# Altium PCB L2_Output.PcbDoc
Units mm, origin at the board's own origin, x right, y up, seen from the top; angles counter-clockwise.
Board outline 96.01 x 58.01 mm, 2 copper layers (Top Layer, Bottom Layer); 71 components, 66 nets, 304 pads, 134 vias.
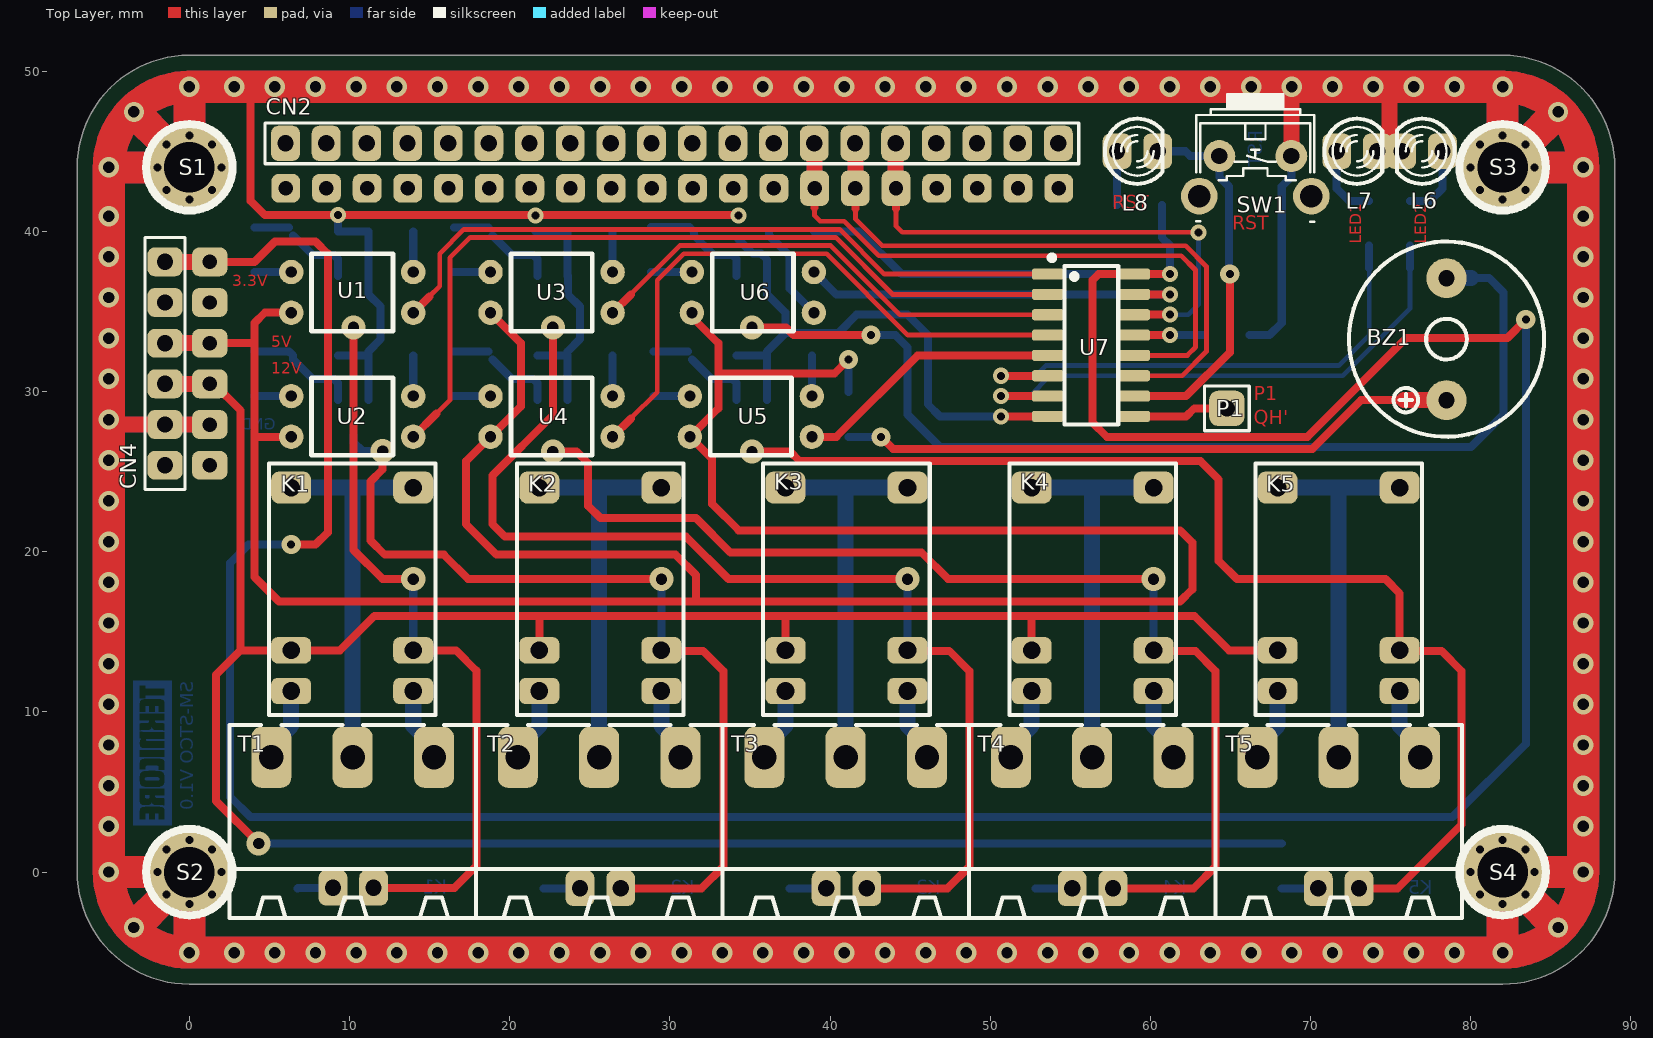
[diagram p0: Top Layer view]
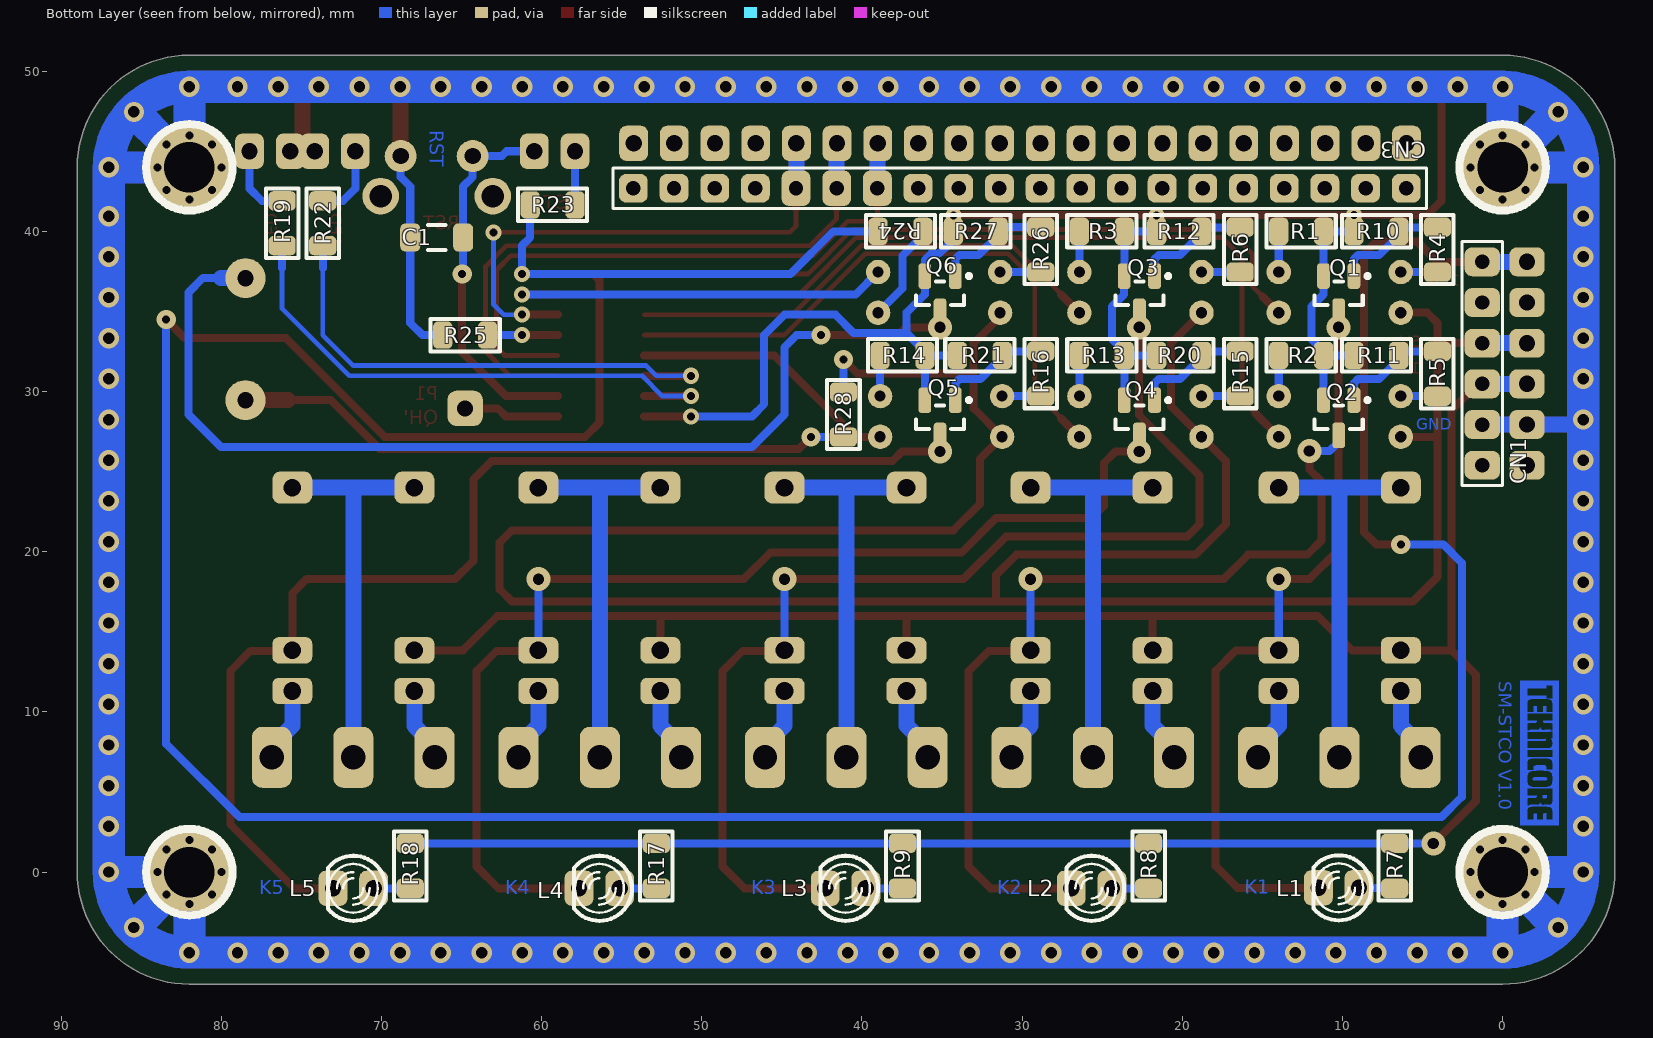
[diagram p1: Bottom Layer view, seen from below]

## Layer stack, top to bottom
Top Solder: solder mask 0.0102, Solder Resist, Dk 3.5
Top Layer: signal copper 0.0356
Dielectric 1: dielectric 0.32, FR-4, Dk 4.8
Bottom Layer: signal copper 0.0356
Bottom Solder: solder mask 0.0102, Solder Resist, Dk 3.5

## Board outline
-7.013,0 ccw(c-0.009,0) -0.009,-7.004 81.991,-7.004 ccw(c81.991,0) 88.995,0 88.995,44 ccw(c81.991,44) 81.991,51.003 -0.009,51.003 ccw(c-0.009,44) -7.013,44

## Design rules (kind name [scope] priority, off if disabled: settings)
Clearance [All] p1: gap=0.2 ignorepadtopadclearanceinfootprint=FALSE
PolygonConnect [All] p1: connectstyle=Relief reliefconductorwidth=0.254 reliefentries=4 polygonreliefangle="90 Angle" airgapwidth=0.254
RoutingVias [All] p1: holewidth=0.711 width=1.27 viastyle="Through Hole" minholewidth=0.5 minwidth=1 maxholewidth=0.711 maxwidth=1.27
SolderMaskExpansion [All] p1: expansion=0.102 istentingtop=FALSE
Width [All] p1: maxlimit=3 minlimit=0.2 preferedwidth=0.5
30 further rules are at their usual default settings.

## Components (designator, comment, footprint, x,y, rotation, side; value= is the part's Value field where it differs from the comment)
BZ1 "Buzzer" Buzzer 78.486,33.274 r90 top
C1 "100nF" CAP1206 66.548,39.624 r180 bottom
CN1 "Header Male 1x6" "HDR_M_1x6PIN_0.2\"" 1.261,38.1 r270 bottom
CN2 "Header Female 1x20" "HDR_F_1x20PIN_0.2\"" 30.121,45.5 r0 top
CN3 "Header Male 1x20" "HDR_M_1x20PIN_0.2\"" 30.141,42.697 r0 bottom
CN4 "Header Female 1x6" "HDR_F_1x6PIN_0.2\"" -1.533,31.75 r270 top
K1 "HJR4102" RELAY_HJR-4102-L-05V 10.16,17.653 r270 top
K2 "HJR4102" RELAY_HJR-4102-L-05V 25.654,17.653 r270 top
K3 "HJR4102" RELAY_HJR-4102-L-05V 41.021,17.653 r270 top
K4 "HJR4102" RELAY_HJR-4102-L-05V 56.388,17.653 r270 top
K5 "HJR4102" RELAY_HJR-4102-L-05V 71.755,17.653 r270 top
L1 "Color?" LED_3mm_R 10.225,-0.986 r0 bottom
L2 "Color?" LED_3mm_R 25.654,-1.016 r0 bottom
L3 "Color?" LED_3mm_R 41.021,-1.016 r0 bottom
L4 "Color?" LED_3mm_R 56.388,-1.016 r0 bottom
L5 "Color?" LED_3mm_R 71.755,-1.016 r0 bottom
L6 "Color?" LED_3mm_R 76.962,45.006 r180 top
L7 "Color?" LED_3mm_R 72.898,45.006 r0 top
L8 "Red" LED_3mm_R 59.182,45.006 r0 top
P1 "Header 1x1" "HDR 1X1-2.54mm" 64.77,28.956 r0 top
Q1 "C945" SOT23_M 10.226,36.111 r270 bottom
Q2 "C945" SOT23_M 10.226,28.364 r270 bottom
Q3 "C945" SOT23_M 22.672,36.111 r270 bottom
Q4 "C945" SOT23_M 22.672,28.364 r270 bottom
Q5 "C945" SOT23_M 35.118,28.364 r270 bottom
Q6 "C945" SOT23_M 35.118,36.111 r270 bottom
R1 "220R" Resistor_SMD_1206 12.57,40.005 r180 bottom
R2 "220R" Resistor_SMD_1206 12.57,32.258 r180 bottom
R3 "220R" Resistor_SMD_1206 25.016,40.005 r180 bottom
R4 "1.5K" Resistor_SMD_1206 4.064,38.865 r270 bottom
R5 "1.5K" Resistor_SMD_1206 4.064,31.112 r270 bottom
R6 "1.5K" Resistor_SMD_1206 16.383,38.865 r270 bottom
R7 "1K" Resistor_SMD_1206 6.731,0.384 r270 bottom
R8 "1K" Resistor_SMD_1206 22.098,0.384 r270 bottom
R9 "1K" Resistor_SMD_1206 37.465,0.384 r270 bottom
R10 "10K" Resistor_SMD_1206 7.874,40.005 r180 bottom
R11 "10K" Resistor_SMD_1206 7.874,32.258 r180 bottom
R12 "10K" Resistor_SMD_1206 20.19,40.005 r180 bottom
R13 "220R" Resistor_SMD_1206 25.019,32.258 r180 bottom
R14 "220R" Resistor_SMD_1206 37.462,32.258 r180 bottom
R15 "1.5K" Resistor_SMD_1206 16.383,31.118 r270 bottom
R16 "1.5K" Resistor_SMD_1206 28.829,31.118 r270 bottom
R17 "1K" Resistor_SMD_1206 52.832,0.384 r270 bottom
R18 "1K" Resistor_SMD_1206 68.199,0.384 r270 bottom
R19 "1K" Resistor_SMD_1206 76.2,40.51 r90 bottom
R20 "10K" Resistor_SMD_1206 20.19,32.258 r180 bottom
R21 "10K" Resistor_SMD_1206 32.633,32.258 r180 bottom
R22 "1K" Resistor_SMD_1206 73.66,40.51 r90 bottom
R23 "82R" Resistor_SMD_1206 59.312,41.656 r0 bottom
R24 "2.4K" Resistor_SMD_1206 37.589,40.005 r0 bottom
R25 "10K" Resistor_SMD_1206 64.77,33.528 r0 bottom
R26 "5.6K" Resistor_SMD_1206 28.829,38.865 r270 bottom
R27 "10K" Resistor_SMD_1206 32.89,40.005 r180 bottom
R28 "15R" Resistor_SMD_1206 41.148,28.572 r90 bottom
S1 "Screw" "Screw 3mm-Invirons 0.254mm" -0.009,44 r0 top
S2 "Screw" "Screw 3mm-Invirons 0.254mm" -0.009,0 r0 top
S3 "Screw" "Screw 3mm-Invirons 0.254mm" 81.991,44 r0 top
S4 "Screw" "Screw 3mm-Invirons 0.254mm" 81.991,0 r0 top
SW1 "Push Button" SW_PushBotton_Right 66.548,44.704 r180 top
T1 "Phoenix" "MSTB 2,5/3-G-5,08" 10.185,7.163 r0 top
T2 "Phoenix" "MSTB 2,5/3-G-5,08" 25.578,7.163 r0 top
T3 "Phoenix" "MSTB 2,5/3-G-5,08" 40.97,7.163 r0 top
T4 "Phoenix" "MSTB 2,5/3-G-5,08" 56.363,7.163 r0 top
T5 "Phoenix" "MSTB 2,5/3-G-5,08" 71.755,7.163 r0 top
U1 "PC817" "PC817 DIP" 10.16,36.195 r180 top
U2 "PC817" "PC817 DIP" 10.16,28.448 r180 top
U3 "PC817" "PC817 DIP" 22.606,36.195 r180 top
U4 "PC817" "PC817 DIP" 22.606,28.448 r180 top
U5 "PC817" "PC817 DIP" 35.052,28.448 r180 top
U6 "PC817" "PC817 DIP" 35.179,36.195 r180 top
U7 "SN74HC595" SOIC16 56.289,32.893 r270 top

## Footprints (in the part's own frame and the unit in brackets; to place one, negate y for a bottom-side part, rotate by r counter-clockwise, add the part's x,y. Pads: shape width x height; smd on the part's side, far side on the other; paste and mask are expansions set on the pad)
Buzzer [mm]
  round 2.5 hole 1.016: 1(-3.81,0) 2(3.81,0)
  silkscreen extent -6.1,-6.1 6.1,6.09, body extent -5.9,-5.9 5.9,5.9, height 10
CAP1206 [mm] "Chip Capacitor, 2-Leads, Body 3/20x1/60mm, IPC Medium Density DESIGNER:ABBAS BASEREH"
  rrect50% 1.25x1.75 smd: 1(-1.651,0) 2(1.651,0)
  silkscreen extent -0.55,-0.77 0.55,0.77, body extent -1.65,-0.85 1.65,0.85, height 0.94
"HDR 1X1-2.54mm" [mm] "1x1x2.54 Pin Header TH V"
  rrect50% 2.2x2.2 hole 1: 1(0,0)
  silkscreen extent -1.4,-1.4 1.4,1.4, body extent -1.27,-1.27 1.27,1.27, height 8.55
"HDR_F_1x6PIN_0.2\"" [mm] "6 row, straight, gold plating"
  rrect50% 1.8x2.2 hole 1.02: 1(-6.35,0) 2(-3.81,0) 3(-1.27,0) 4(1.27,0) 5(3.81,0) 6(6.35,0)
  silkscreen extent -7.87,-1.25 7.87,1.25, body extent -7.87,-1.25 7.87,1.25, height 8.55
"HDR_F_1x20PIN_0.2\"" [mm] "20 row, straight, gold plating"
  rrect50% 1.8x2.2 hole 1.02: 1(-24.13,0) 2(-21.59,0) 3(-19.05,0) 4(-16.51,0) 5(-13.97,0) 6(-11.43,0) 7(-8.89,0) 8(-6.35,0) 9(-3.81,0) 10(-1.27,0) 11(1.27,0) 12(3.81,0) 13(6.35,0) 14(8.89,0) 15(11.43,0) 16(13.97,0) 17(16.51,0) 18(19.05,0) 19(21.59,0) 20(24.13,0)
  silkscreen extent -25.4,-1.27 25.4,1.27, body extent -25.65,-1.25 25.65,1.25, height 8.55
"HDR_M_1x6PIN_0.2\"" [mm] "6 row, straight, gold plating"
  rrect50% 1.8x2.2 hole 0.9: 1(0,0) 2(2.54,0) 3(5.08,0) 4(7.62,0) 5(10.16,0) 6(12.7,0)
  silkscreen extent -1.27,-1.27 13.97,1.27, body extent -1.28,-1.38 13.96,1.54, height 8.61
"HDR_M_1x20PIN_0.2\"" [mm] "2.00 mm THT Pin Header, 20p"
  rrect50% 1.8x1.8 hole 0.9: 1(-24.13,0) 2(-21.59,0) 3(-19.05,0) 4(-16.51,0) 5(-13.97,0) 6(-11.43,0) 7(-8.89,0) 8(-6.35,0) 9(-3.81,0) 10(-1.27,0) 11(1.27,0) 12(3.81,0) 13(6.35,0) 17(16.51,0) 18(19.05,0) 19(21.59,0) 20(24.13,0)
  rrect50% 1.8x2.2 hole 0.9: 14(8.89,0) 15(11.43,0) 16(13.97,0)
  silkscreen extent -25.4,-1.27 25.4,1.27, body extent -25.39,-1.27 25.4,1.26, height 8.51
LED_3mm_R [mm]
  rrect50% 1.8x2.2 hole 1.016: A(-1.27,0) K(1.27,0)
  silkscreen extent -2.03,-2.03 1.57,2.03, body extent -1.66,-1.65 1.64,1.65, height 5.51
"MSTB 2,5/3-G-5,08" [mm] "Header, Nominal current: 12 A Rated voltage (III/2): 320 V Number of positions: 3 Pitch: 5.08 mm Color: green Contact surface: Tin Assembly: Soldering  DESIGNER:ABBAS BASEREH"
  rrect50% 2.5x3.8 hole 1.524: 1(-5.08,0) 2(0,0) 3(5.08,0)
  silkscreen extent -7.7,-10.03 7.7,2.03, body extent -7.62,-10 7.62,2, height 8.63
"PC817 DIP" [mil]
  round 60 hole 27.56: 1(-150,50) 2(-150,-50) 3(150,-50) 4(150,50)
  round 19.68 on Top Overlay: ""(-120,95) ""(-80,75)
  silkscreen extent -100,-95 100,96, body extent -155,-91 154,90, height 154
RELAY_HJR-4102-L-05V [mm]
  rrect50% 2x2.5 hole 1.1: 1(-6.35,-3.81) 12(-6.35,3.81)
  rrect50% 1.65x2.5 hole 1.1: 5(3.81,-3.81) 6(6.35,-3.81) 7(6.35,3.81) 8(3.81,3.81)
  silkscreen extent -7.85,-5.2 7.85,5.2, body extent -7.85,-5.2 7.85,5.2, height 11.7
Resistor_SMD_1206 [mm]
  rrect50% 1.2x1.7 smd: 1(-1.4,0) 2(1.4,0)
  silkscreen extent -2.16,-1.02 2.16,1.02, body extent -1.52,-0.76 1.52,0.76, height 0.6
"Screw 3mm-Invirons 0.254mm" [mm]
  round 0.5 hole 0.5: S(-2,0) S(-1.414,-1.414) S(-1.414,1.414) S(0,-2) S(0,2) S(1.414,-1.414) S(1.414,1.414) S(2,0)
  round 5 hole 3.15 mask+0.1: S(0,0)
  silkscreen extent -2.7,-2.7 2.7,2.7, body extent -2.8,-2.8 2.8,2.8, height 2.58
SOIC16 [mm] "(Make www.tarahiboard.com)"
  rrect50% 0.7x2 smd: 1(-4.445,-2.695) 2(-3.175,-2.695) 3(-1.905,-2.695) 4(-0.635,-2.695) 5(0.635,-2.695) 6(1.905,-2.695) 7(3.175,-2.695) 8(4.445,-2.695) 9(4.445,2.695) 10(3.175,2.695) 11(1.905,2.695) 12(0.635,2.695) 13(-0.635,2.695) 14(-1.905,2.695) 15(-3.175,2.695) 16(-4.445,2.695)
  silkscreen extent -5.54,-2.52 4.95,1.7, body extent -5.09,-3.03 5.11,2.97, height 1.7
SOT23_M [mm] "SOT23, 3-Leads, Body 2.9x1.3mm, Pitch 0.95mm, Lead Span 2.3mm, IPC Low Density"
  rrect50% 1.6x0.8 smd: 1(-1.1,0.95) 2(-1.1,-0.95) 3(1.1,0)
  silkscreen extent -1.22,-1.5 0.7,1.92, body extent -1.27,-1.5 1.27,1.5, height 1.1
SW_PushBotton_Right [mm] "Horizontal 6.0mm Square Type (Snap-in) SKHH Series; Stem length 3.85 mm ; 1,000,000 cycles ; 0.98N Force"
  round 2 hole 1.016: 1(-2.25,0) 2(2.25,0)
  round 2.286 hole 1.397: MH(-3.5,2.5) MH(3.5,2.5)
  silkscreen extent -3.68,-3.85 3.68,4.09, body extent -4.25,-3.86 4.25,4.04, height 7.43

## Part data
C1: library part "Capacitor Poliester & Ceramic", "Capacitor Poliester & Ceramic"
K1 K2 K3 K4 K5: library part Relay_HJR4102, "Small size and low cost", ComponentLink1Description=Datasheet
L1 L2 L3 L4 L5 L6 L7 L8: library part LED, "LED"
P1: library part "Header Male 1x1"
Q1 Q2 Q3 Q4 Q5 Q6: "NPN Silicon Epitaxial Planar Transistor"
R1 R2 R3 R4 R5 R6 R7 R8 R9 R10 R11 R12 R13 R14 R15 R16 R17 R18 R19 R20 R21 R22 R23 R24 R25 R26 R27 R28: library part Resistor, "Resistor"
SW1: library part "Push Button 4PIN Right", "Push Button 4PIN Right"
T1 T2 T3 T4 T5: library part "Terminal Phoenix 3 Pin", "Terminal Phoenix 3 Pin"
U1 U2 U3 U4 U5 U6: "1-CHANNEL TRANSISTOR OUTPUT TYPE PHOTO COUPLER"
U7: "SNx4HC595 8-Bit Shift Registers With 3-State Output Registers"

## Free pads (board coordinates)
  round 1.5 on Mech1: 28(-0.009,44) 28(-0.009,44) 29(-0.009,0) 29(-0.009,0) 30(81.991,0) 30(81.991,0) 31(81.991,44) 31(81.991,44) 32(-1.533,38.1) 32(-1.533,38.1) 32(-1.533,38.1) 32(1.261,38.1) 32(1.261,38.1) 32(1.261,38.1) 32(6.011,42.697) 32(6.011,42.697) 32(6.011,42.697) 33(5.991,45.5) 33(5.991,45.5) 33(5.991,45.5)

## Via types
v1: diameter 1.27, hole 0.711, Top Layer to Bottom Layer, 106 vias
v2: diameter 1, hole 0.5, Top Layer to Bottom Layer, 11 vias
v3: diameter 1.5, hole 0.7, Top Layer to Bottom Layer, 11 vias
v4: diameter 1.2, hole 0.5, Top Layer to Bottom Layer, 6 vias

## Nets (pads, with @x,y where several pads share a name; then routed paths per layer and width w, separated by ;. In a path a pad name is that pad's centre, name@x,y a point inside that pad or via, vN(x,y) a via of type N, cw(c..) or ccw(c..) an arc to the next point about the centre after c; other vN are vias at no path point)
+3.3: CN1.1 CN4.1 R23.2 R24.2 U7.16 | length 234.7
  Top Layer w0.5: CN1.1 4.064,38.1 5.334,39.37 7.874,39.37 8.636,38.608 8.636,21.209 7.874,20.447 v4(6.35,20.447) ; v2(61.214,37.338) 56.769,37.338 56.388,36.957 56.388,28.067 57.277,27.178 69.799,27.178 75.971,33.35 82.296,33.35 v4(83.439,34.493)
  Top Layer w1: CN4.1 CN1.1
  Bottom Layer w0.5: v4(6.35,20.447) 3.683,20.447 2.54,19.304 2.54,4.699 3.81,3.429 78.867,3.429 83.439,8.001 v4(83.439,34.493) ; R24.2 41.783,40.005 44.45,37.338 v2(61.214,37.338) 61.214,39.116 60.712,39.618 R23.2
  Bottom Layer w1: CN4.1 CN1.1
+5: CN1.3 CN4.3 R28.2 U1.4 U2.4 U3.4 U4.4 U5.4 U6.4 | length 179.8
  Top Layer w0.5: CN1.3 4.064,33.02 ; U2.4 4.064,27.178 ; U1.4 4.699,34.925 4.064,34.29 4.064,33.02 ; U3.4 20.701,33.02 20.701,29.083 U4.4 17.272,25.654 17.272,21.717 19.177,19.812 30.353,19.812 31.623,18.542 31.623,16.891 ; U6.4@31.115,34.925 33.02,33.02 33.02,31.115 ; v4(41.148,32.004) 40.259,31.115 33.02,31.115 ; 4.064,27.178 4.064,18.415 5.588,16.891 31.623,16.891 ; 4.064,27.178 4.064,33.02 ; 31.623,16.891 61.849,16.891 62.611,17.653 62.611,20.574 61.849,21.336 34.29,21.336 32.639,22.987 32.639,25.781 U5.4 33.02,28.956 33.02,31.115
  Top Layer w1: CN4.3 CN1.3
  Bottom Layer w0.5: R28.2 v4(41.148,32.004)
  Bottom Layer w1: CN4.3 CN1.3
+12: CN1.4 CN4.4 K1.5 K2.5 K3.5 K4.5 K5.5 R7.1 R8.1 R9.1 R17.1 R18.1 | length 180.4
  Top Layer w0.5: CN1.4 1.524,30.48 3.175,28.829 3.175,13.843 ; v3(4.318,1.778) 1.651,4.445 1.651,12.319 3.175,13.843 ; K5.5 64.897,13.843 62.738,16.002 52.578,16.002 ; 3.175,13.843 K1.5 9.398,13.843 11.557,16.002 21.844,16.002 ; 21.844,16.002 37.211,16.002 ; 21.844,16.002 K2.5 21.844,16.002 ; 37.211,16.002 K3.5 37.211,16.002 ; 37.211,16.002 52.578,16.002 ; 52.578,16.002 K4.5 52.578,16.002
  Top Layer w1: CN4.4 CN1.4
  Bottom Layer w0.5: v3(4.318,1.778) 4.324,1.784 R7.1 R8.1 R9.1 R17.1 R18.1
  Bottom Layer w1: CN4.4 CN1.4
Buzzer: U6.2 U7.15 | length 25
  Top Layer w0.5: U7.15 v2(61.214,36.068)
  Bottom Layer w0.5: U6.2 40.386,36.068 v2(61.214,36.068)
GND: C1.1 CN1.5 CN4.5 L6.K L7.K Q1.2 Q2.2 Q3.2 Q4.2 Q5.2 Q6.2 R1.2 R2.2 R3.2 R10.1 R11.1 R12.1 R13.2 R14.2 R20.1 R21.1 R25.2 R27.1 S1.S S2.S S3.S S4.S SW1.1 U7.8 | length 881.7
  Top Layer w0.5: 3.81,49.022 3.81,41.91 4.699,41.021 34.25,41.021 v2(34.29,40.981) ; v2(21.59,40.981) v2@21.61,41.001 ; v2(50.673,28.448) U7.8
  Top Layer w1: v1@-5.042,27.9 -5.002,27.94 CN4.5 CN1.5 ; 62.753,49.033 62.753,49.5 ; SW1.1 v1@68.798,49.033 ; L7.K@74.93,44.74 74.93,49.033
  Top Layer w2: v1(-3.47,-3.461) -1.423,-1.414 S2.S@-0.009,0 ; v1(-3.47,47.461) -1.423,45.414 S1.S@-0.009,44 ; v1(85.452,-3.461) 83.405,-1.414 S4.S@81.991,0 ; v1(85.452,47.461) 83.405,45.414 S3.S@81.991,44 ; v1(-5.042,0) ccw(c-0.009,0) v1(-0.009,-5.033) ; v1(-5.042,0) v1(-5.042,2.852) v1(-5.042,5.392) v1(-5.042,7.932) v1(-5.042,10.472) v1(-5.042,13.012) v1(-5.042,15.552) v1(-5.042,18.092) v1(-5.042,20.632) v1(-5.042,23.172) v1(-5.042,25.712) -5.042,27.9 v1(-5.042,28.252) v1(-5.042,30.792) v1(-5.042,33.332) v1(-5.042,35.872) v1(-5.042,38.412) v1(-5.042,40.952) v1(-5.042,44) ; v1(-5.042,0) -2.009,0 S2.S@-0.009,0 ; v1(-5.042,44) cw(c-0.009,44) v1(-0.009,49.033) ; v1(-5.042,44) cw(c-0.009,44) v1(-0.009,49.033) ; v1(-5.042,44) cw(c-0.009,44) v1(-0.009,49.033) ; v1(-5.042,44) -2.009,44 S1.S@-0.009,44 ; v1(-0.009,-5.033) v1(2.785,-5.033) v1(5.325,-5.033) v1(7.865,-5.033) v1(10.405,-5.033) v1(12.945,-5.033) v1(15.485,-5.033) v1(18.025,-5.033) v1(20.565,-5.033) v1(23.105,-5.033) v1(25.645,-5.033) v1(28.185,-5.033) v1(30.725,-5.033) v1(33.265,-5.033) v1(35.805,-5.033) v1(38.345,-5.033) v1(40.885,-5.033) v1(43.425,-5.033) v1(45.965,-5.033) v1(48.505,-5.033) v1(51.045,-5.033) v1(53.585,-5.033) v1(56.125,-5.033) v1(58.665,-5.033) v1(61.205,-5.033) v1(63.745,-5.033) v1(66.285,-5.033) v1(68.825,-5.033) v1(71.365,-5.033) v1(73.905,-5.033) v1(76.445,-5.033) v1(78.985,-5.033) v1(81.991,-5.033) ; v1(-0.009,-5.033) -0.009,-2 S2.S@-0.009,0 ; S1.S@-0.009,44 -0.009,46 v1(-0.009,49.033) ; v1(-0.009,49.033) v1(2.785,49.033) v1(5.325,49.033) v1(7.865,49.033) v1(10.405,49.033) v1(12.945,49.033) v1(15.485,49.033) v1(18.025,49.033) v1(20.565,49.033) v1(23.105,49.033) v1(25.645,49.033) v1(28.185,49.033) v1(30.725,49.033) v1(33.265,49.033) v1(35.805,49.033) v1(38.345,49.033) v1(40.885,49.033) v1(43.425,49.033) v1(45.965,49.033) v1(48.505,49.033) v1(51.045,49.033) v1(53.585,49.033) v1(56.125,49.033) v1(58.665,49.033) v1(61.205,49.033) 62.753,49.033 v1(63.745,49.033) v1(66.285,49.033) 68.798,49.033 v1(68.825,49.033) v1(71.365,49.033) v1(73.905,49.033) 74.93,49.033 v1(76.445,49.033) v1(78.985,49.033) v1(81.991,49.033) ; v1(81.991,-5.033) ccw(c81.991,0) v1(87.024,0) ; v1(81.991,-5.033) ccw(c81.991,0) v1(87.024,0) ; v1(81.991,-5.033) 81.991,-2 S4.S@81.991,0 ; S4.S@81.991,0 83.991,0 v1(87.024,0) ; S3.S@81.991,44 83.991,44 v1(87.024,44) ; S3.S@81.991,44 81.991,46 v1(81.991,49.033) ; v1(81.991,49.033) cw(c81.991,44) v1(87.024,44) ; v1(81.991,49.033) cw(c81.991,44) v1(87.024,44) ; v1(87.024,0) v1(87.024,2.852) v1(87.024,5.392) v1(87.024,7.932) v1(87.024,10.472) v1(87.024,13.012) v1(87.024,15.552) v1(87.024,18.092) v1(87.024,20.632) v1(87.024,23.172) v1(87.024,25.712) v1(87.024,28.252) v1(87.024,30.792) v1(87.024,33.332) v1(87.024,35.872) v1(87.024,38.412) v1(87.024,40.952) v1(87.024,44)
  Bottom Layer w0.5: v2(9.271,41.013) 9.271,40.008 R10.1 R10.1@9.306,40.037 ; R11.1 R2.2 ; R10.1@9.306,40.005 R1.2 Q1.2@11.17,37.217 ; Q2.2 11.17,29.47 R2.2 ; Q1.2 11.176,36.068 11.938,35.306 11.938,33.274 11.17,32.506 R2.2 ; R12.1 R3.2 Q3.2@23.616,37.217 ; R20.1@21.72,32.258 23.616,32.258 Q4.2@23.616,29.47 ; R13.2@23.616,32.506 24.384,33.274 24.384,35.306 23.622,36.068 Q3.2 ; R21.1@34.166,32.258 R14.2 ; R27.1@34.29,39.497 34.629,39.158 35.179,38.608 35.687,38.608 36.068,38.227 Q6.2 36.068,36.068 37.211,34.925 37.211,33.655 ; Q5.2@36.062,29.47 R14.2 ; v2(50.673,28.448) 46.863,28.448 46.101,29.21 46.101,33.528 44.831,34.798 41.656,34.798 40.513,33.655 37.211,33.655 ; R25.2 67.437,33.528 68.199,34.29 C1.1 68.199,42.799 68.798,43.398 SW1.1 ; R14.2 36.062,32.506 37.211,33.655
  Bottom Layer w1: v1@-5.002,27.94 CN4.5 CN1.5
  Bottom Layer w2: v1(-3.47,-3.461) -1.423,-1.414 S2.S@-0.009,0 ; v1(-3.47,47.461) -1.423,45.414 S1.S@-0.009,44 ; v1(85.452,-3.461) 83.405,-1.414 S4.S@81.991,0 ; v1(85.452,47.461) 83.405,45.414 S3.S@81.991,44 ; v1(-5.042,0) ccw(c-0.009,0) v1(-0.009,-5.033) ; v1(-5.042,0) v1(-5.042,2.852) v1(-5.042,5.392) v1(-5.042,7.932) v1(-5.042,10.472) v1(-5.042,13.012) v1(-5.042,15.552) v1(-5.042,18.092) v1(-5.042,20.632) v1(-5.042,23.172) v1(-5.042,25.712) v1(-5.042,28.252) v1(-5.042,30.792) v1(-5.042,33.332) v1(-5.042,35.872) v1(-5.042,38.412) v1(-5.042,40.952) v1(-5.042,44) ; v1(-5.042,0) -2.009,0 S2.S@-0.009,0 ; v1(-5.042,44) cw(c-0.009,44) v1(-0.009,49.033) ; v1(-5.042,44) cw(c-0.009,44) v1(-0.009,49.033) ; v1(-5.042,44) -2.009,44 S1.S@-0.009,44 ; v1(-0.009,-5.033) v1(2.785,-5.033) v1(5.325,-5.033) v1(7.865,-5.033) v1(10.405,-5.033) v1(12.945,-5.033) v1(15.485,-5.033) v1(18.025,-5.033) v1(20.565,-5.033) v1(23.105,-5.033) v1(25.645,-5.033) v1(28.185,-5.033) v1(30.725,-5.033) v1(33.265,-5.033) v1(35.805,-5.033) v1(38.345,-5.033) v1(40.885,-5.033) v1(43.425,-5.033) v1(45.965,-5.033) v1(48.505,-5.033) v1(51.045,-5.033) v1(53.585,-5.033) v1(56.125,-5.033) v1(58.665,-5.033) v1(61.205,-5.033) v1(63.745,-5.033) v1(66.285,-5.033) v1(68.825,-5.033) v1(71.365,-5.033) v1(73.905,-5.033) v1(76.445,-5.033) v1(78.985,-5.033) v1(81.991,-5.033) ; v1(-0.009,-5.033) -0.009,-2 S2.S@-0.009,0 ; S1.S@-0.009,44 -0.009,46 v1(-0.009,49.033) ; v1(-0.009,49.033) v1(2.785,49.033) v1(5.325,49.033) v1(7.865,49.033) v1(10.405,49.033) v1(12.945,49.033) v1(15.485,49.033) v1(18.025,49.033) v1(20.565,49.033) v1(23.105,49.033) v1(25.645,49.033) v1(28.185,49.033) v1(30.725,49.033) v1(33.265,49.033) v1(35.805,49.033) v1(38.345,49.033) v1(40.885,49.033) v1(43.425,49.033) v1(45.965,49.033) v1(48.505,49.033) v1(51.045,49.033) v1(53.585,49.033) v1(56.125,49.033) v1(58.665,49.033) v1(61.205,49.033) v1(63.745,49.033) v1(66.285,49.033) v1(68.825,49.033) v1(71.365,49.033) v1(73.905,49.033) v1(76.445,49.033) v1(78.985,49.033) v1(81.991,49.033) ; v1(81.991,-5.033) ccw(c81.991,0) v1(87.024,0) ; v1(81.991,-5.033) ccw(c81.991,0) v1(87.024,0) ; v1(81.991,-5.033) 81.991,-2 S4.S@81.991,0 ; S4.S@81.991,0 83.991,0 v1(87.024,0) ; S3.S@81.991,44 81.991,46 v1(81.991,49.033) ; S3.S@81.991,44 83.991,44 v1(87.024,44) ; v1(81.991,49.033) cw(c81.991,44) v1(87.024,44) ; v1(81.991,49.033) cw(c81.991,44) v1(87.024,44) ; v1(87.024,0) v1(87.024,2.852) v1(87.024,5.392) v1(87.024,7.932) v1(87.024,10.472) v1(87.024,13.012) v1(87.024,15.552) v1(87.024,18.092) v1(87.024,20.632) v1(87.024,23.172) v1(87.024,25.712) v1(87.024,28.252) v1(87.024,30.792) v1(87.024,33.332) v1(87.024,35.872) v1(87.024,38.412) v1(87.024,40.952) v1(87.024,44)
LED_1: R22.1 U7.6 | length 32.5
  Top Layer w0.5: v2(50.673,30.988) U7.6
  Bottom Layer w0.3: v2(50.673,30.988) 52.832,30.988 53.467,31.623 71.755,31.623 73.66,33.528 73.66,37.719
  Bottom Layer w0.5: 73.66,37.719 R22.1
LED_2: R19.1 U7.7 | length 36
  Top Layer w0.5: v2(50.673,29.718) U7.7
  Bottom Layer w0.3: v2(50.673,29.718) 52.451,29.718 53.721,30.988 72.009,30.988 76.2,35.179 R19.1
  Bottom Layer w0.5: 76.2,37.719 R19.1
NetBZ1_1: BZ1.1 R28.1 | length 38.9
  Top Layer w0.5: v4(43.18,27.172) 43.936,26.416 70.104,26.416 73.152,29.464 75.819,29.464
  Top Layer w1: 75.819,29.464 BZ1.1
  Bottom Layer w0.5: R28.1 v4(43.18,27.172)
NetBZ1_2: BZ1.2 Q6.3 | length 64.8
  Top Layer w0.5: v3(35.128,34.011) 37.236,34.011 37.719,33.528 v4(42.545,33.528)
  Bottom Layer w0.5: v4(42.545,33.528) 44.069,33.528 44.831,32.766 44.831,28.575 46.863,26.543 80.01,26.543 82.042,28.575 82.042,36.195 81.153,37.084 80.01,37.084
  Bottom Layer w1: BZ1.2 80.01,37.084
NetC1_2: C1.2 L8.K SW1.2 U7.10 | length 23.6
  Top Layer w0.5: U7.10 62.23,29.718 64.957,32.445 v4(64.957,37.341)
  Bottom Layer w0.5: L8.K 62.182,45.006 62.484,44.704 SW1.2 64.298,43.398 64.897,42.799 C1.2 64.897,37.401 v4(64.957,37.341)
NetK1_1: K1.1 K1.12 T1.2 | length 28.2
  Bottom Layer w1: K1.1 K1.12 10.185,24.003 T1.2
NetK1_6: K1.6 T1.1 | length 4.7
  Top Layer w1: T1.1 T1.1@5.105,7.899
  Bottom Layer w1: T1.1@5.105,7.899 6.35,9.144 K1.6
NetK1_7: K1.7 T1.3 | length 3.9
  Bottom Layer w1: K1.7 13.97,9.144 T1.3@15.215,7.899
NetK1_8: K1.8 L1.K Q1.3 | length 46.5
  Top Layer w0.5: v3(10.236,34.011) 10.236,25.984 10.236,20.117 12.065,18.288 v3(13.97,18.288) ; L1.K 16.54,-0.986 17.907,0.381 17.907,12.573 16.637,13.843 K1.8
  Bottom Layer w0.5: K1.8 v3(13.97,18.288)
NetK2_1: K2.1 K2.12 T2.2 | length 28.2
  Bottom Layer w1: K2.1@21.742,24.003 29.362,24.003 25.578,24.003 T2.2
NetK2_6: K2.6 T2.1 | length 3.9
  Bottom Layer w1: T2.1@20.599,7.899 21.844,9.144 K2.6
NetK2_7: K2.7 T2.3 | length 3.9
  Bottom Layer w1: K2.7 29.464,9.144 T2.3@30.709,7.899
NetK2_8: K2.8 L2.K Q2.3 | length 55.6
  Top Layer w0.5: v3(12.065,26.289) 12.065,25.146 11.303,24.384 11.303,20.701 12.192,19.812 15.875,19.812 17.399,18.288 v3(29.464,18.288) ; L2.K 31.969,-1.016 33.336,0.351 33.336,12.543 32.066,13.813 K2.8@29.399,13.813
  Bottom Layer w0.5: Q2.3 10.226,26.858 10.795,26.289 v3(12.065,26.289) ; K2.8 v3(29.464,18.288)
NetK3_1: K3.1 K3.12 T3.2 | length 28.2
  Bottom Layer w1: K3.1@37.135,24.003 44.755,24.003 40.97,24.003 T3.2
NetK3_6: K3.6 T3.1 | length 3.9
  Bottom Layer w1: T3.1@35.966,7.899 37.211,9.144 K3.6
NetK3_7: K3.7 T3.3 | length 3.9
  Bottom Layer w1: K3.7 44.831,9.144 T3.3@46.076,7.899
NetK3_8: K3.8 L3.K Q3.3 | length 69.1
  Top Layer w0.5: v3(22.682,34.011) 22.682,28.524 18.923,24.765 18.923,21.717 19.685,20.955 30.988,20.955 33.655,18.288 v3(44.831,18.288) ; L3.K 47.336,-1.016 48.703,0.351 48.703,12.543 47.433,13.813 K3.8@44.766,13.813
  Bottom Layer w0.5: K3.8 v3@44.831,18.161
NetK4_1: K4.1 K4.12 T4.2 | length 28.2
  Bottom Layer w1: K4.1@52.527,24.003 60.147,24.003 56.363,24.003 T4.2
NetK4_6: K4.6 T4.1 | length 3.9
  Bottom Layer w1: T4.1@51.333,7.899 52.578,9.144 K4.6
NetK4_7: K4.7 T4.3 | length 3.9
  Bottom Layer w1: K4.7 60.198,9.144 T4.3@61.443,7.899
NetK4_8: K4.8 L4.K Q4.3 | length 70.5
  Top Layer w0.5: v3(22.682,26.264) 24.155,26.264 24.892,25.527 24.892,22.86 25.654,22.098 31.623,22.098 33.782,19.939 45.72,19.939 47.371,18.288 v3(60.198,18.288) ; L4.K 62.703,-1.016 64.07,0.351 64.07,12.543 62.8,13.813 K4.8@60.133,13.813
  Bottom Layer w0.5: K4.8 v3(60.198,18.288)
NetK5_1: K5.1 K5.12 T5.2 | length 28.2
  Bottom Layer w1: K5.1@67.92,24.003 75.54,24.003 71.755,24.003 T5.2
NetK5_6: K5.6 T5.1 | length 3.9
  Bottom Layer w1: T5.1@66.7,7.899 67.945,9.144 K5.6
NetK5_7: K5.7 T5.3 | length 3.9
  Bottom Layer w1: K5.7 75.565,9.144 T5.3@76.81,7.899
NetK5_8: K5.8 L5.K Q5.3 | length 72.7
  Top Layer w0.5: v3(35.128,26.264) 37.49,26.264 38.1,25.654 63.119,25.654 64.262,24.511 64.262,19.431 65.405,18.288 74.676,18.288 75.565,17.399 K5.8 ; L5.K 75.438,-1.016 79.437,2.983 79.437,12.543 78.167,13.813 K5.8@75.5,13.813
NetL1_A: L1.A R7.2 | length 2.2
  Bottom Layer w0.5: R7.2 6.761,-0.986 L1.A
NetL2_A: L2.A R8.2 | length 2.3
  Bottom Layer w0.5: R8.2 L2.A
NetL3_A: L3.A R9.2 | length 2.3
  Bottom Layer w0.5: R9.2 L3.A
NetL4_A: L4.A R17.2 | length 2.3
  Bottom Layer w0.5: R17.2 L4.A
NetL5_A: L5.A R18.2 | length 2.3
  Bottom Layer w0.5: R18.2 L5.A
NetL6_A: L6.A R19.2 | length 4.7
  Bottom Layer w0.5: R19.2 77.47,41.91 78.232,42.672 L6.A
NetL7_A: L7.A R22.2 | length 4.7
  Bottom Layer w0.5: L7.A 71.628,42.672 72.39,41.91 R22.2
NetL8_A: L8.A R23.1 | length 3.4
  Bottom Layer w0.5: R23.1 L8.A
NetP1_1: P1.1 U7.9 | length 6
  Top Layer w0.5: U7.9 62.23,28.448 62.738,28.956 P1.1
NetQ1_1: Q1.1 R4.1 R10.2 | length 6.6
  Bottom Layer w0.5: R4.1@4.064,40.259 R10.2@6.22,40.259 ; R10.2@6.474,39.754 7.696,38.532 9.017,38.532 9.276,38.273 Q1.1
NetQ2_1: Q2.1 R5.1 R11.2 | length 7.2
  Bottom Layer w0.5: R5.1 6.22,32.512 R11.2 6.474,32.007 7.696,30.785 9.017,30.785 9.276,30.526 Q2.1
NetQ3_1: Q3.1 R6.1 R12.2 | length 6.6
  Bottom Layer w0.5: R6.1@16.51,40.259 R12.2@18.666,40.259 ; R12.2@18.92,39.754 20.142,38.532 21.463,38.532 21.722,38.273 Q3.1
NetQ4_1: Q4.1 R15.1 R20.2 | length 6.6
  Bottom Layer w0.5: R15.1@16.51,32.512 R20.2@18.666,32.512 ; R20.2@18.92,32.007 20.142,30.785 21.463,30.785 21.722,30.526 Q4.1
NetQ5_1: Q5.1 R16.1 R21.2 | length 6.6
  Bottom Layer w0.5: R16.1@28.956,32.512 R21.2@31.112,32.512 ; R21.2@31.366,32.007 32.588,30.785 33.909,30.785 34.168,30.526 Q5.1
NetQ6_1: Q6.1 R26.1 R27.2 | length 7.4
  Bottom Layer w0.5: R26.1 31.23,40.265 R27.2 31.49,39.757 32.715,38.532 33.909,38.532 34.168,38.273 Q6.1
NetR1_1: R1.1 U1.2 | length 2.5
  Bottom Layer w0.5: U1.2 R1.1
NetR2_1: R2.1 U2.2 | length 2.5
  Bottom Layer w0.5: U2.2 R2.1
NetR3_1: R3.1 U3.2 | length 2.5
  Bottom Layer w0.5: U3.2 R3.1
NetR4_2: R4.2 U1.3 | length 2.3
  Bottom Layer w0.5: R4.2@4.064,37.459 U1.3@6.344,37.459
NetR5_2: R5.2 U2.3 | length 2.3
  Bottom Layer w0.5: R5.2 6.344,29.712 U2.3
NetR6_2: R6.2 U3.3 | length 2.3
  Bottom Layer w0.5: R6.2@16.51,37.459 U3.3@18.79,37.459
NetR13_1: R13.1 U4.2 | length 2.5
  Bottom Layer w0.5: U4.2 R13.1@26.416,32.258
NetR14_1: R14.1 U5.2 | length 2.5
  Bottom Layer w0.5: U5.2 R14.1
NetR15_2: R15.2 U4.3 | length 2.3
  Bottom Layer w0.5: R15.2@16.51,29.712 U4.3@18.79,29.712
NetR16_2: R16.2 U5.3 | length 2.3
  Bottom Layer w0.5: R16.2@28.956,29.712 U5.3@31.236,29.712
NetR24_1: R24.1 U6.1 | length 6.2
  Bottom Layer w0.5: R24.1 36.189,39.755 37.465,38.479 37.465,36.449 U6.1
NetR25_1: R25.1 U7.13 | length 4.4
  Top Layer w0.5: U7.13 v2(61.214,33.528)
  Bottom Layer w0.5: v2(61.214,33.528) R25.1
NetR26_2: R26.2 U6.3 | length 2.5
  Bottom Layer w0.5: R26.2 U6.3
RCLK: CN2.14 CN3.14 U7.12 | length 41.4
  Top Layer w0.3: 39.031,41.487 39.031,40.979 39.37,40.64 40.874,40.64 43.033,38.481 61.925,38.481 62.814,37.592 62.814,32.766 62.306,32.258 U7.12
  Top Layer w0.5: 39.031,41.487 CN3.14
  Top Layer w1: CN3.14@39.011,42.717 CN2.14
  Bottom Layer w1: CN2.14 39.011,42.717 CN3.14
Relay_1: U1.1 U7.1 | length 44.1
  Top Layer w0.3: 14.986,35.941 15.621,36.576 15.621,38.608 17.137,40.124 40.605,40.124 43.391,37.338 U7.1
  Top Layer w0.5: U1.1 14.986,35.941
Relay_2: U2.1 U7.2 | length 51.5
  Top Layer w0.3: 15.43,28.639 16.256,29.464 16.256,38.354 17.526,39.624 40.34,39.624 43.896,36.068 U7.2
  Top Layer w0.5: U2.1 15.43,28.639
Relay_3: U3.1 U7.3 | length 30.7
  Top Layer w0.3: 27.559,36.068 30.607,39.116 40.029,39.116 44.347,34.798 U7.3
  Top Layer w0.5: U3.1 27.559,36.068
Relay_4: U4.1 U7.4 | length 38.1
  Top Layer w0.3: 27.559,28.321 29.21,29.972 29.21,36.957 30.861,38.608 39.779,38.608 44.859,33.528 U7.4
  Top Layer w0.5: U4.1 27.559,28.321
Relay_5: U5.1 U7.5 | length 16.8
  Top Layer w0.5: U5.1 40.386,27.178 45.466,32.258 U7.5
SER: CN2.16 CN3.16 U7.14 | length 35.8
  Top Layer w0.3: 44.111,41.444 44.111,40.344 44.51,39.945 v2(62.992,39.945)
  Top Layer w0.5: 44.111,41.444 CN3.16 ; U7.14 v2(61.214,34.798)
  Top Layer w1: CN3.16@44.091,42.717 CN2.16
  Bottom Layer w0.3: v2(61.214,34.798) 62.357,34.798 62.992,35.433 v2(62.992,39.945)
  Bottom Layer w1: CN2.16 44.091,42.717 CN3.16
SRCLK: CN2.15 CN3.15 U7.11 | length 41.1
  Top Layer w0.3: 41.591,41.424 41.591,40.762 43.244,39.108 62.194,39.108 63.491,37.811 63.491,32.503 61.976,30.988 U7.11
  Top Layer w0.5: 41.591,41.424 CN3.15@41.591,42.677
  Top Layer w1: CN3.15 CN2.15@41.571,45.48
  Bottom Layer w1: CN2.15 41.571,45.48 CN3.15
pads on no net: CN1.2 CN1.6 CN2.1 CN2.2 CN2.3 CN2.4 CN2.5 CN2.6 CN2.7 CN2.8 CN2.9 CN2.10 CN2.11 CN2.12 CN2.13 CN2.17 CN2.18 CN2.19 CN2.20 CN3.1 CN3.2 CN3.3 CN3.4 CN3.5 CN3.6 CN3.7 CN3.8 CN3.9 CN3.10 CN3.11 CN3.12 CN3.13 CN3.17 CN3.18 CN3.19 CN3.20 CN4.2 CN4.6 SW1.MH U1. U2. U3. U4. U5. U6.

## Other copper
Top Layer:
  text "RST" at 57.606,41.084 h1.5
  text "RST" at 65.099,39.788 h1.5
  text "LED1" at 73.4,39.236 h1.2 r90
  text "LED2" at 77.464,39.236 h1.2 r90
  text "3.3V" at 2.679,36.328 h1.2
  text "5V" at 5.092,32.518 h1.2
  text "12V" at 5.092,30.867 h1.2
  text "P1 / QH'" at 66.445,27.648 h1.5
Bottom Layer:
  region: 5 vertices and 9 holes, not listed, extent -3.512,2.916 -1.106,11.936
  region: -1.954,5.736 -1.966,5.736 -1.966,5.73 -2.7,5.73 -2.7,5.736 -2.724,5.736 -2.724,5.742 -2.736,5.742 -2.736,5.748 -2.748,5.748 -2.748,5.754 -2.754,5.754 -2.754,5.76 -2.76,5.76 -2.76,5.766 -2.766,5.766 -2.766,5.772 -2.772,5.772 -2.772,5.784 -2.778,5.784 -2.778,5.796 -2.784,5.796 -2.784,5.832 -2.778,5.832 -2.778,5.844 -2.772,5.844 -2.772,5.856 -2.766,5.856 -2.766,5.868 -2.76,5.868 -2.76,5.874 -2.748,5.874 -2.748,5.88 -2.742,5.88 -2.742,5.886 -2.73,5.886 -2.73,5.892 -2.712,5.892 -2.712,5.898 -2.67,5.898 -2.67,5.905 -1.996,5.905 -1.996,5.898 -1.954,5.898 -1.954,5.892 -1.936,5.892 -1.936,5.886 -1.93,5.886 -1.93,5.88 -1.918,5.88 -1.918,5.874 -1.912,5.874 -1.912,5.868 -1.906,5.868 -1.906,5.862 -1.9,5.862 -1.9,5.856 -1.894,5.856 -1.894,5.844 -1.888,5.844 -1.888,5.79 -1.894,5.79 -1.894,5.778 -1.9,5.778 -1.9,5.766 -1.906,5.766 -1.906,5.76 -1.912,5.76 -1.912,5.754 -1.918,5.754 -1.918,5.748 -1.93,5.748 -1.93,5.742 -1.942,5.742 -1.942,5.736 -1.948,5.736
  region: -2.664,4.78 -2.501,4.78 -2.501,4.684 -2.507,4.684 -2.507,4.66 -2.513,4.66 -2.513,4.648 -2.519,4.648 -2.519,4.636 -2.525,4.636 -2.525,4.63 -2.537,4.63 -2.537,4.624 -2.543,4.624 -2.543,4.618 -2.568,4.618 -2.568,4.612 -2.628,4.612 -2.628,4.606 -2.634,4.606 -2.634,4.612 -2.694,4.612 -2.694,4.618 -2.712,4.618 -2.712,4.624 -2.724,4.624 -2.724,4.63 -2.736,4.63 -2.736,4.636 -2.742,4.636 -2.742,4.642 -2.748,4.642 -2.748,4.654 -2.754,4.654 -2.754,4.666 -2.76,4.666 -2.76,4.69 -2.766,4.69 -2.766,4.78 -2.67,4.78
  text "RST" at 67.298,46.331 h1.5 r90
  text "GND" at 5.391,27.362 h1.2
  text "SM-STCO V1.0" at 0.522,11.923 h1.4 r90
  text "K1" at 16.105,-1.664 h1.5
  text "K2" at 31.534,-1.694 h1.5
  text "K3" at 46.901,-1.694 h1.5
  text "K4" at 62.268,-1.694 h1.5
  text "K5" at 77.635,-1.694 h1.5

## Silkscreen, mask and mechanical layers (free items; w line width, h text height)
Top Solder:
  lines w2: -5.042,44 cw(c-0.009,44) -0.009,49.033 ; -5.042,44 cw(c-0.009,44) -0.009,49.033 ; -5.042,44 -5.042,27.9 -5.042,0 ccw(c-0.009,0) -0.009,-5.033 81.991,-5.033 ; -0.009,49.033 81.991,49.033 ; 81.991,-5.033 ccw(c81.991,0) 87.024,0 ; 81.991,-5.033 ccw(c81.991,0) 87.024,0 ; 81.991,49.033 cw(c81.991,44) 87.024,44 ; 81.991,49.033 cw(c81.991,44) 87.024,44 ; 87.024,0 87.024,44
Bottom Solder:
  lines w2: -5.042,44 cw(c-0.009,44) -0.009,49.033 ; -5.042,44 cw(c-0.009,44) -0.009,49.033 ; -5.042,44 -5.042,27.9 -5.042,0 ccw(c-0.009,0) -0.009,-5.033 81.991,-5.033 ; -0.009,49.033 81.991,49.033 ; 81.991,-5.033 ccw(c81.991,0) 87.024,0 ; 81.991,-5.033 ccw(c81.991,0) 87.024,0 ; 81.991,49.033 cw(c81.991,44) 87.024,44 ; 81.991,49.033 cw(c81.991,44) 87.024,44 ; 87.024,0 87.024,44
Mechanical 1:
  lines w0.254: -11.876,-5.045 -11.209,-7.045 ; -11.876,48.962 -11.209,50.962 ; -11.463,-7.045 -10.955,-7.045 ; -11.463,-7.004 -0.009,-7.004 ; -11.463,50.962 -10.955,50.962 ; -11.463,51.003 -0.009,51.003 ; -11.209,11.2 -11.209,-7.045 ; -11.209,32.717 -11.209,50.962 ; -10.542,-5.045 -11.209,-7.045 ; -10.542,48.962 -11.209,50.962 ; -7.054,-9.654 -7.054,-9.146 ; -7.013,-9.654 -7.013,0 ; -5.054,-10.067 -7.054,-9.4 ; -5.054,-8.733 -7.054,-9.4 ; 30.191,-9.4 -7.054,-9.4 ; 51.708,-9.4 88.953,-9.4 ; 86.953,-10.067 88.953,-9.4 ; 86.953,-8.733 88.953,-9.4 ; 88.953,-9.654 88.953,-9.146 ; 88.995,-9.654 88.995,0 ; -7.013,0 ccw(c-0.009,0) -0.009,-7.004 ; -7.013,0 -7.013,44 cw(c-0.009,44) -0.009,51.003 ; -0.009,-7.004 81.991,-7.004 ccw(c81.991,0) 88.995,0 ; -0.009,51.003 81.991,51.003 cw(c81.991,44) 88.995,44 88.995,0
  text "58.007 (mm)" at -9.701,11.454 h2 r90
  text "96.007 (mm)" at 30.445,-10.908 h2